# EAGLE board SAN - (Smart Assistive Navigator) (EAGLE 9.7.0)

Size 170.47 x 133.44 mm. Coordinates in mm from the lower left corner, seen from the top.
Outline: 0,0 170.47,0 170.47,133.44 0,133.44 0,0
Copper layers (1*16): Top 0.035mm / dielectric 1.5mm / Bottom 0.035mm
Design rules "default": minimum track width 6mil, minimum drill 0.35mm, track to track 6mil, track to pad 6mil, pad to pad 6mil, via to via 6mil, smd to smd 6mil, copper to edge 40mil, drill to drill 6mil, minimum pad ring 10mil, minimum via ring 8mil, stop-mask expansion 4mil, vias tented up to drill 0mil, thermal gap 10mil

## Footprints (pad centres in the part's own frame; a part is rotated, then mirrored left to right if it is on the bottom)
HC-SR04 = drill 1.016 long: 1 -3.81,0; 2 -1.27,0; 3 1.27,0; 4 3.81,0
MOTOR = drill 1.118 pad 3.15 octagon: + 2.54,0; - -2.54,0
PIEZO = drill 1 pad 1.6: 1 -3.5,0; 2 3.5,0
TO92 = drill 0.813 octagon: 1 -1.27,0; 2 0,1.905; 3 1.27,0
ARDUINO-UNO-R3-SHIELD = drill 1.016 pad 1.88: 3.3V 24.13,-2.54; 5V 24.13,0; A0 24.13,12.7; A1 24.13,15.24; A2 24.13,17.78; A3 24.13,20.32; A4 24.13,22.86; A5 24.13,25.4; AREF -24.13,-13.97; D2 -24.13,20.32; D3 -24.13,17.78; D4 -24.13,15.24; D5 -24.13,12.7; D6 -24.13,10.16; D7 -24.13,7.62; D8 -24.13,3.81; D9 -24.13,1.27; D10 -24.13,-1.27; D11 -24.13,-3.81; D12 -24.13,-6.35; D13 -24.13,-8.89; GND@0 24.13,2.54; GND@1 24.13,5.08; GND@2 -24.13,-11.43; IOREF 24.13,-7.62; NC 24.13,-10.16; RES 24.13,-5.08; RX -24.13,25.4; SCL -24.13,-19.05; SDA -24.13,-16.51; TX -24.13,22.86; VIN 24.13,7.62
LCD-I2C = drill 1.016 long: 1 -19.05,-5.08; 2 -19.05,-7.62; 3 -19.05,-10.16; 4 -19.05,-12.7

## Placement (x,y rotation side)
DISTFRONT_OBSTACLE_MEASURER  DISTANCE-SENSOR-4PINHC-SR04  [HC-SR04]  162.85,78.14 270 top
DISTGROUNDDISTANCE_MEASURER  DISTANCE-SENSOR-4PINHC-SR04  [HC-SR04]  126.33,32.92 180 top
M1  MOTOR_HDR  [MOTOR]  89.74,114.95 0 top
PIEZO1  PIEZO  [PIEZO]  148.28,119.86 0 top
T1  NPN  [TO92]  111.82,122.79 0 top
U1  ARDUINO-UNO-R3-SHIELD  [ARDUINO-UNO-R3-SHIELD]  101.97,75.73 270 top
U2  LCD-16X2-I2CSUNFOUNDER-IIC  [LCD-I2C]  30.73,36.63 0 top

## Library data of the parts
DISTFRONT_OBSTACLE_MEASURER DISTGROUNDDISTANCE_MEASURER M1 PIEZO1 U1 U2 = Tinkercad
T1 = Tinkercad; CATEGORY: Transistor; SUB-CATEGORY: BJT; TYPE: NPN

## Nets
M1_+: M1.+ T1.1
U1_5V: DISTFRONT_OBSTACLE_MEASURER.1 DISTGROUNDDISTANCE_MEASURER.1 T1.3 U1.5V U2.2
U1_A4: U1.A4 U2.3
U1_A5: U1.A5 U2.4
U1_D2: DISTFRONT_OBSTACLE_MEASURER.3 U1.D2
U1_D3: DISTFRONT_OBSTACLE_MEASURER.2 U1.D3
U1_D4: DISTGROUNDDISTANCE_MEASURER.3 U1.D4
U1_D5: DISTGROUNDDISTANCE_MEASURER.2 U1.D5
U1_D9: T1.2 U1.D9
U1_D11: PIEZO1.1 U1.D11
U1_GND: DISTFRONT_OBSTACLE_MEASURER.4 DISTGROUNDDISTANCE_MEASURER.4 M1.- PIEZO1.2 U1.GND@0 U1.GND@1 U1.GND@2 U2.1

## Tracks (layer width: path | path; a pad name or v marks a point on that pad's centre or on a via)
M1_+  (1 unrouted)
U1_5V  (4 unrouted)
U1_A4  (1 unrouted)
U1_A5  (1 unrouted)
U1_D2  (1 unrouted)
U1_D3  (1 unrouted)
U1_D4  (1 unrouted)
U1_D5  (1 unrouted)
U1_D9  (1 unrouted)
U1_D11  (1 unrouted)
U1_GND  (7 unrouted)